# EAGLE board RN42 (EAGLE 9.3.1)
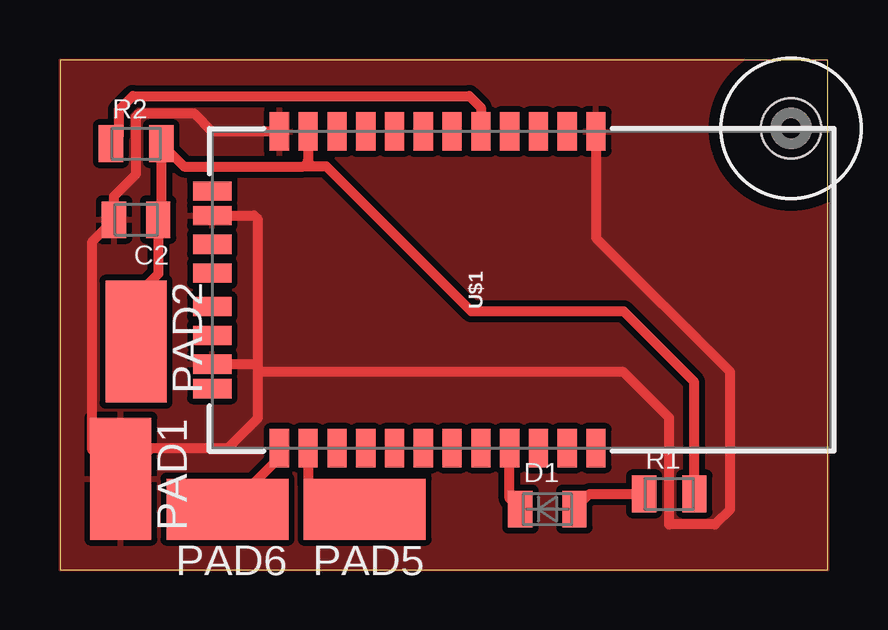
[diagram p0: board, top side]
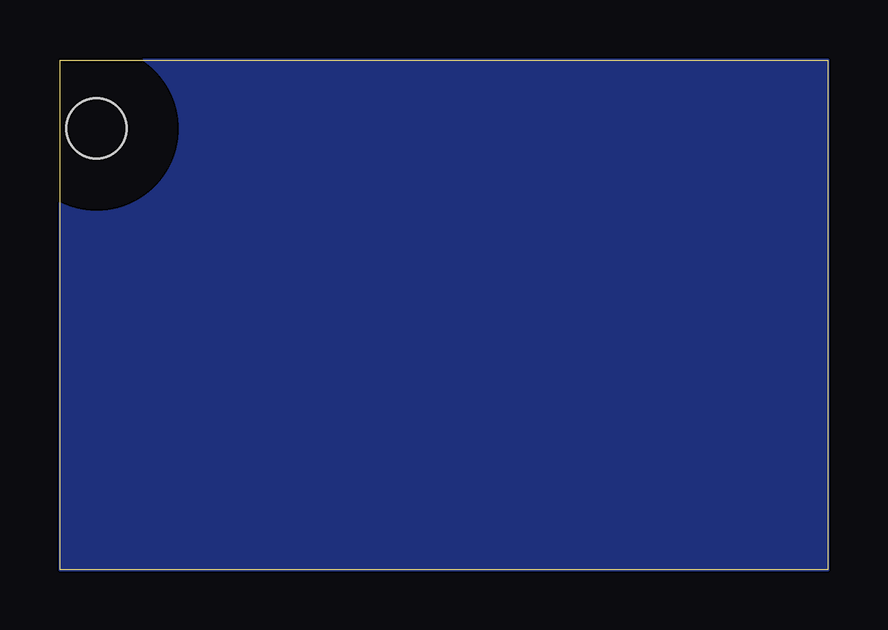
[diagram p1: board, bottom side, seen from below]

Size 32 x 21.27 mm. Coordinates in mm from the lower left corner, seen from the top.
Outline: 0,0 32,0 32,21.27 0,21.27 0,0
Copper layers (1*16): Top 0.0356mm / dielectric 1.5011mm / Bottom 0.0356mm
Design rules "formitaminimum": minimum track width 5mil, minimum drill 0.5994mm, track to track 0.2007mm, track to pad 0.2007mm, pad to pad 0.2007mm, via to via 0.2007mm, smd to smd 0mil, copper to edge 0mil, drill to drill 1mil, minimum pad ring 10mil, minimum via ring 8mil, stop-mask expansion 4mil, vias tented up to drill 0mil, thermal gap 10mil

## Footprints (pad centres in the part's own frame; a part is rotated, then mirrored left to right if it is on the bottom)
2012-C = smd 1.016 x 1.524: 1 -0.921,0; 2 0.921,0
D2012 = smd 1.016 x 1.524: A 1.127,0; K -1.127,0
SMD2,54-5,08 = smd 2.54 x 5.08: 1 0,0
2012-R = smd 1.016 x 1.524: 1 -1.048,0; 2 1.048,0
RN41 = smd 0.8 x 1.6: 1 -6.6,-6.6; 2 -5.4,-6.6; 3 -4.2,-6.6; 4 -3,-6.6; 5 -1.8,-6.6; 6 -0.6,-6.6; 7 0.6,-6.6; 8 1.8,-6.6; 9 3,-6.6; 10 4.2,-6.6; 11 5.4,-6.6; 12 6.6,-6.6; 13 6.6,6.6; 14 5.4,6.6; 15 4.2,6.6; 16 3,6.6; 17 1.8,6.6; 18 0.6,6.6; 19 -0.6,6.6; 20 -1.8,6.6; 21 -3,6.6; 22 -4.2,6.6; 23 -5.4,6.6; 24 -6.6,6.6 | smd 1.6 x 0.8: 28 9.4,3.1; 29 9.4,-3.1; 30 9.4,4.122; 31 9.4,1.9; 32 9.4,0.7; 33 9.4,-0.7; 34 9.4,-1.9; 35 9.4,-4.122
DRIL-2,5 = hole 2.5: 0,0

## Placement (x,y rotation side)
C2  0.1u  [2012-C]  3.17,14.61 180 top
D1  LED-SMD2012  [D2012]  20.32,2.54 0 top
PAD1  [SMD2,54-5,08]  2.54,3.81 180 top
PAD2  [SMD2,54-5,08]  3.17,9.53 180 top
PAD5  [SMD2,54-5,08]  12.7,2.54 90 top
PAD6  [SMD2,54-5,08]  6.99,2.54 90 top
R1  1.5k  [2012-R]  25.4,3.17 0 top
R2  10k  [2012-R]  3.17,17.78 0 top
U$1  BLUETOOTH-RN-41"  [RN41]  15.75,11.68 180 top
U$2  [DRIL-2,5]  30.48,18.41 0 top

## Library data of the parts
C2 R1 R2 = Passive_Robotech
D1 = Diode_Robotech
PAD1 PAD2 PAD5 PAD6 = wirepad
U$1 = SparkFun-RF; PROD_ID: IC-11844; SF_ID: WRL-12575
U$2 = special

## Nets
+3V3: C2.1 PAD2.1 R1.2 R2.2 U$1.11
GND: C2.2 PAD1.1 U$1.1 U$1.12 U$1.28 U$1.29
N$1: D1.K U$1.21
N$2: D1.A R1.1
N$3: PAD5.1 U$1.14
N$4: R2.1 U$1.5
N$6: PAD6.1 U$1.13

## Tracks (layer width: path | path; a pad name or v marks a point on that pad's centre or on a via)
+3V3
  Top 0.406: PAD2.1 3.17,11.43 4.1,12.35 C2.1 4.22,14.73 R2.2 5.17,16.83 10.16,16.83 | 10.54,16.83 11.11,16.83 17.14,10.79 23.5,10.79 26.45,7.84 R1.2 | 10.54,16.83 10.16,16.83 | U$1.11 10.35,17.14 10.35,17.02 | 10.54,16.83 10.35,17.02 | 10.16,16.83 10.35,17.02
GND
  Top 0.406: 8.26,8.26 8.26,6.35 6.99,5.08 3.81,5.08 PAD1.1 1.35,5 1.35,13.7 C2.2 2.25,15.59 3.17,16.51 3.17,18.89 3.33,19.05 5.58,19.05 6.35,18.28 U$1.12 | 8.26,8.26 8.26,8.58 | U$1.1 22.35,13.85 27.94,8.26 27.94,2.54 27.3,1.91 25.4,1.91 25.4,6.35 23.5,8.26 8.26,8.26 | U$1.28 8.26,8.58 | 8.26,8.58 8.26,14.61 8.08,14.78 U$1.29
  pour Top (isolate 0.254): 0,21.27 32,21.27 32,0 0,0
  pour Bottom (isolate 0.254): 0,21.27 32,21.27 32,0 0,0
N$1
  Top 0.406: D1.K 18.75,2.98 U$1.21
N$2
  Top 0.406: D1.A 22.08,3.17 R1.1
N$3
  Top 0.406: U$1.14 10.35,3.62 11.43,2.54 PAD5.1
N$4
  Top 0.406: U$1.5 17.55,19.28 17.07,19.76 3.04,19.76 2.46,19.19 2.46,18.12 R2.1
N$6
  Top 0.406: U$1.13 9.15,4.7 PAD6.1